# Altium PCB LKS_Motor_0318.PcbDoc (part 1 of 2)
Units mm, origin at the board's own origin, x right, y up, seen from the top; angles counter-clockwise.
Board outline 117 x 10 mm, 2 copper layers (Top Layer, Bottom Layer); 107 components, 71 nets, 323 pads, 186 vias.
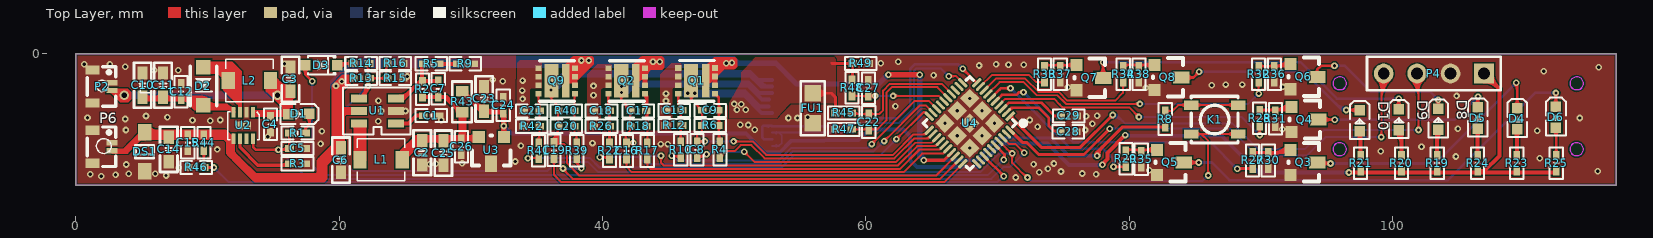
[diagram p0: Top Layer view]
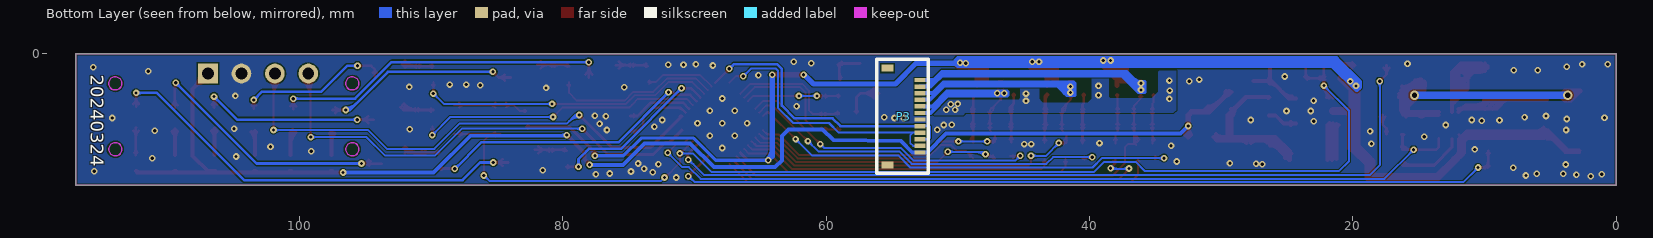
[diagram p1: Bottom Layer view, seen from below]
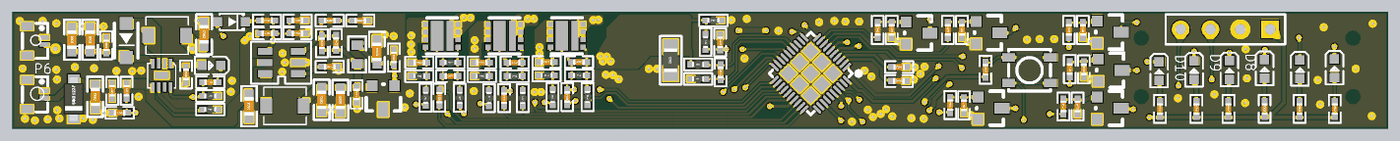
[diagram p3: 3D render of the assembled board from above, using the file's embedded part models]

## Layer stack, top to bottom
Top Solder: solder mask 0.0102, Solder Resist, Dk 3.5
Top Layer: signal copper 0.0356
Dielectric1: core 0.32, FR-4, Dk 4.8
Bottom Layer: signal copper 0.0356
Bottom Solder: solder mask 0.0102, Solder Resist, Dk 3.5

## Board outline
0,-10 0,0 117,0 117,-10

## Design rules (kind name [scope] priority, off if disabled: settings)
Clearance [All] p1: gap=0.1 ignorepadtopadclearanceinfootprint=FALSE except(0: Arc-Hole Track-Hole SMDPad-Hole THPad-Hole Via-Hole Fill-Hole Poly-Hole Region-Hole Text-Hole)
ComponentClearance [All] p1 off: gap=0.254 collisioncheckmode=3 verticalgap=0.254 showdistances=FALSE
FabricationTestpoint [(IsPad And (OnTopLayer Or OnBottomLayer))] p1: side=3 testpointundercomponent=TRUE minsize=1.016 maxsize=2.54 preferedsize=1.524 minholesize=0 maxholesize=1.016 preferedholesize=0.813 testpointgrid=0.025 allowsidetop=TRUE allowsidebottom=TRUE usegrid=TRUE gridtolerance=0
HoleSize [All] p1: absolutevalues=TRUE maxlimit=5.08 minlimit=0.025 maxpercent=80.000 minpercent=20.000
HoleToHoleClearance [All] p1: gap=0.127 allowstackedmicrovias=TRUE
MinimumSolderMaskSliver [All] p1 off: minsoldermaskwidth=0.127
PlaneClearance [All] p1: clearance=0.178
PlaneConnect [All] p1: planeconnectstyle=Direct reliefexpansion=0.508 reliefentries=4 reliefconductorwidth=0.254 reliefairgap=0.254
PolygonConnect [All] p1: connectstyle=Direct reliefconductorwidth=0.254 reliefentries=4 polygonreliefangle="90 Angle" airgapwidth=0.254
RoutingVias [All] p1: holewidth=0.457 width=0.762 viastyle="Through Hole" minholewidth=0.2 minwidth=0.5 maxholewidth=1 maxwidth=2
SilkToSilkClearance [All] p1 off: silktosilkclearance=0
SilkToSolderMaskClearance SilkscreenOverComponentPads [IsPad] p1 off: minsilkscreentomaskgap=0.127 clearancetoexposedcopper=TRUE
SolderMaskExpansion [All] p1: expansion=0.102 istentingtop=FALSE
Width [All] p1: maxlimit=2.54 minlimit=0.127 preferedwidth=0.203
21 further rules are at their usual default settings.

## Components (designator, comment, footprint, x,y, rotation, side; value= is the part's Value field where it differs from the comment)
C1 "1uF/16V" "C 0402_M" 27,-4.699 r180 top
C2 "10uF/16V" "C 0603_M" 26.314,-7.518 r90 top
C3 "22uF/25V" "C 0603_M" 16.307,-1.93 r270 top
C4 "1uF/25V" "C 0402_M" 14.783,-5.359 r270 top
C5 "103" "R 0402_M" 16.84,-7.188 r180 top
C6 "10uF/16V" "C 0603_M" 20.142,-8.077 r90 top
C7 "10pF/16V" "C 0402_M" 27.534,-2.667 r270 top
C8 "4.7uF/25V" "C 0402_M" 47.193,-7.29 r270 top
C9 "1nF" "C 0402_M" 48.187,-4.299 r0 top
C10 "22uF/25V" "C 0603_M" 5.08,-2.388 r270 top
C11 "22uF/25V" "C 0603_M" 6.629,-2.388 r270 top
C12 "4.7uF/25V" "C 0402_M" 8.001,-2.87 r270 top
C13 "1nF" "C 0402_M" 45.441,-4.299 r0 top
C14 "22uF/25V" "C 0603_M" 7.061,-7.264 r90 top
C15 "1uF/25V" "C 0402_M" 8.509,-6.756 r90 top
C16 "4.7uF/25V" "C 0402_M" 41.832,-7.382 r270 top
C17 "1nF" "C 0402_M" 42.721,-4.334 r0 top
C18 "1nF" "C 0402_M" 39.927,-4.334 r0 top
C19 "4.7uF/25V" "C 0402_M" 36.322,-7.341 r270 top
C20 "1nF" "C 0402_M" 37.26,-5.502 r0 top
C21 "1nF" "C 0402_M" 34.619,-4.334 r0 top
C22 "NC" "C 0402_M" 60.223,-5.182 r90 top
C23 "10uF/10V" "C 0603_M" 31.013,-3.429 r270 top
C24 "100nF" "C 0402_M" 32.461,-3.912 r90 top
C25 "10uF/10V" "C 0603_M" 27.915,-7.544 r90 top
C26 "100nF/10V" "C 0402_M" 29.286,-7.061 r270 top
C27 "1nF/50V" "C 0402_M" 60.198,-2.616 r270 top
C28 "100nF/50V" "C 0402_M" 75.387,-5.918 r0 top
C29 "1uF/10V" "C 0402_M" 75.413,-4.724 r180 top
D1 "LED_R" 0603-LED 17.018,-4.648 r180 top
D2 "SS34" SOD123FL 9.703,-2.235 r270 top
D3 "4148" SOD-323 18.644,-0.864 r180 top
D4 "LED_R" 0603-LED 109.55,-4.851 r270 top
D5 "LED_R" 0603-LED 106.553,-4.801 r270 top
D6 "LED_R" 0603-LED 112.497,-4.75 r270 top
D8 "LED_R" 0603-LED 103.556,-4.902 r270 top
D9 "LED_R" 0603-LED 100.559,-4.928 r270 top
D10 "LED_R" 0603-LED 97.587,-5.004 r270 top
DS1 "SMF12CA-MS" SOD-123F 5.232,-7.442 r90 top
FU1 "0.05R" "R 0805_M" 55.982,-4.14 r90 top
K1 "K1" SMD3.3X3.3X2 86.5,-5 r0 top
L1 "6.8uH" "SMD3.5X3 .2- duplicate" 23.19,-8.052 r0 top
L2 "4.7uH" "SMD3.5X3 .2- duplicate" 13.183,-2.032 r0 top
P2 "Header 2" CONN_SMD_2P_0.6 1.88,-2.515 r270 top
P3 "Header 12" SMD-12 52.883,-7.493 r90 bottom
P4 "Header 4" HDR1X4 106.959,-1.499 r180 top
P6 "Header 2" CONN_SMD_2P_0.6 1.88,-7.087 r270 top
Q1 "CJBM3020" DFN-3X3_8 48.543,-3.027 r90 top
Q2 "CJBM3020" DFN-3X3_8 43.229,-3.037 r90 top
Q3 "J3Y" SOT-23 92.253,-7.29 r270 top
Q4 "J3Y" SOT-23 92.329,-4.039 r270 top
Q5 "J3Y" SOT-23 82.118,-7.29 r270 top
Q6 "J3Y" SOT-23 92.253,-0.787 r270 top
Q7 "J3Y" SOT-23 75.997,-0.864 r270 top
Q8 "J3Y" SOT-23 81.94,-0.838 r270 top
Q9 "CJBM3020" DFN-3X3_8 37.921,-3.037 r90 top
R1 "4.7K" "C 0402_M" 16.84,-6.02 r0 top
R2 "2.5M" "C 0402_M" 26.34,-2.692 r90 top
R3 "510" "R 0402_M" 16.84,-8.357 r0 top
R4 "10R" "R 0402_M" 48.919,-7.296 r270 top
R5 "340K" "C 0402_M" 27,-0.762 r0 top
R6 "10K" "R 0402_M" 48.187,-5.442 r180 top
R8 "200K" "C 0402_M" 82.753,-4.953 r270 top
R9 "0" "C 0402_M" 29.591,-0.762 r0 top
R10 "10R" "R 0402_M" 45.949,-7.29 r270 top
R12 "10K" "R 0402_M" 45.441,-5.442 r180 top
R13 "1.5M/NC" "C 0402_M" 21.692,-1.854 r0 top
R14 "1K" "C 0402_M" 21.666,-0.737 r0 top
R15 "100K" "C 0402_M" 24.257,-1.854 r180 top
R16 "100K" "C 0402_M" 24.257,-0.737 r0 top
R17 "10R" "R 0402_M" 43.409,-7.382 r270 top
R18 "10K" "R 0402_M" 42.721,-5.502 r180 top
R19 "1K" "C 0402_M" 103.403,-8.306 r270 top
R20 "1K" "C 0402_M" 100.686,-8.306 r270 top
R21 "1K" "C 0402_M" 97.587,-8.306 r270 top
R22 "10R" "R 0402_M" 40.537,-7.382 r270 top
R23 "1K" "C 0402_M" 109.449,-8.306 r270 top
R24 "1K" "C 0402_M" 106.477,-8.306 r270 top
R25 "1K" "C 0402_M" 112.446,-8.306 r270 top
R26 "10K" "R 0402_M" 39.927,-5.502 r180 top
R27 "10K" "C 0402_M" 89.383,-8.103 r270 top
R28 "10K" "C 0402_M" 89.916,-4.902 r270 top
R29 "10K" "C 0402_M" 79.756,-7.976 r270 top
R30 "100K" "C 0402_M" 90.576,-8.103 r270 top
R31 "100K" "C 0402_M" 91.11,-4.928 r270 top
R32 "10K" "C 0402_M" 89.84,-1.549 r270 top
R33 "10K" "C 0402_M" 73.584,-1.549 r270 top
R34 "10K" "C 0402_M" 79.553,-1.549 r270 top
R35 "100K" "C 0402_M" 80.924,-8.001 r270 top
R36 "100K" "C 0402_M" 91.034,-1.549 r270 top
R37 "100K" "C 0402_M" 74.778,-1.549 r270 top
R38 "100K" "C 0402_M" 80.747,-1.549 r270 top
R39 "10R" "R 0402_M" 38.048,-7.356 r270 top
R40 "10K" "R 0402_M" 37.26,-4.334 r180 top
R41 "10R" "R 0402_M" 35.152,-7.356 r270 top
R42 "10K" "R 0402_M" 34.619,-5.502 r180 top
R43 "0R/NC" 0603 29.337,-3.658 r90 top
R44 "2M" "C 0402_M" 9.728,-6.756 r270 top
R45 "1K1%" "R 0402_M" 58.318,-4.496 r0 top
R46 "470K" "C 0402_M" 9.144,-8.636 r180 top
R47 "1K1%" "R 0402_M" 58.318,-5.74 r0 top
R48 "1K" "R 0402_M" 58.953,-2.591 r270 top
R49 "10R" "R 0402_M" 59.614,-0.737 r0 top
U1 "CS5503R" SOT23-6L 22.962,-4.394 r180 top
U2 "CS5090EL" DFN2X2_8_0.5 12.725,-5.436 r180 top
U3 "CJ6376A33MY" SOT-23 32.512,-6.325 r180 top
U4 "LKS32MC074DOF8Q8" QFN40 67.92,-5.283 r225 top

## Footprints (in the part's own frame and the unit in brackets; to place one, negate y for a bottom-side part, rotate by r counter-clockwise, add the part's x,y. Pads: shape width x height; smd on the part's side, far side on the other; paste and mask are expansions set on the pad)
0603 [mm]
  rect 0.8x0.955 smd: 1(-0.795,0) 2(0.795,0)
  silkscreen extent -1.53,-0.75 1.56,0.75
0603-LED [mm]
  rect 0.8x0.8 smd: 1(0.876,-0.073) 2(-0.723,-0.08)
  silkscreen extent -1.41,-0.82 1.47,0.68
"C 0402_M" [mil] "无极性贴片电容"
  rect 26x20 smd: 1(-24,0) 2(24,0)
  silkscreen extent -47,-20 47,20, body extent -20,-10 20,10, height 21
"C 0603_M" [mil] "无极性贴片电容"
  rect 40x30 smd: 1(-36.5,0) 2(36.5,0)
  silkscreen extent -68,-26 68,26, body extent -31,-16 31,16, height 32
CONN_SMD_2P_0.6 [mm]
  rect 0.4x0.8 smd: 1(-0.324,0.871) 2(0.276,0.871)
  rect 0.7x1.05 smd: 3(1.226,-0.604) 4(-1.274,-0.604)
  silkscreen extent -1.52,-1.01 1.48,1.15
DFN2X2_8_0.5 [mm]
  rect 0.3x0.8 smd: 1(-0.75,-1) 2(-0.25,-1) 3(0.25,-1) 4(0.75,-1) 5(0.75,1) 6(0.25,1) 7(-0.25,1) 8(-0.75,1)
  rect 1.2x0.6 smd: 9(0,0)
  silkscreen extent -1.19,-1.02 1.2,1.08
DFN-3X3_8 [mil]
  rect 17x18 smd: 1(0,0) 2(25.59,0) 3(51.18,0) 4(76.77,0) 5(76.77,109.58) 6(51.18,109.58) 7(25.59,109.58) 8(0,109.58)
  rect 100x23 smd: 9(38.33,27.5)
  rect 100x42 smd: 10(38.33,70.83)
  silkscreen extent -23,2 99,106
HDR1X4 [mm] "Connector; Header; 4 Position"
  rect 1.5x1.5 hole 0.9: 1(0,0)
  round 1.5 hole 0.9: 2(2.54,0) 3(5.08,0) 4(7.62,0)
  silkscreen extent -1.27,-1.27 8.89,1.27
QFN40 [mm]
  rect 1.05x1.05 smd: 0(-1.32,-1.352) 0(-1.32,1.308) 0(-1.32,-0.022) 0(0.01,-0.022) 0(0.01,-1.352) 0(0.01,1.308) 0(1.34,-1.352) 0(1.34,-0.022) 0(1.34,1.308)
  rect 0.9x0.24 smd: 1(-2.54,1.778)
  oval 0.9x0.24 smd: 2(-2.54,1.378) 3(-2.54,0.978) 4(-2.54,0.578) 5(-2.54,0.178) 6(-2.54,-0.222) 7(-2.54,-0.622) 8(-2.54,-1.022) 9(-2.54,-1.422) 10(-2.54,-1.822) 21(2.56,-1.822) 22(2.56,-1.422) 23(2.56,-1.022) 24(2.56,-0.622) 25(2.56,-0.222) 26(2.56,0.178) 27(2.56,0.578) 28(2.56,0.978) 29(2.56,1.378) 30(2.56,1.778)
  oval 0.24x0.9 smd: 11(-1.79,-2.572) 12(-1.39,-2.572) 13(-0.99,-2.572) 14(-0.59,-2.572) 15(-0.19,-2.572) 16(0.21,-2.572) 17(0.61,-2.572) 18(1.01,-2.572) 19(1.41,-2.572) 20(1.81,-2.572) 31(1.81,2.528) 32(1.41,2.528) 33(1.01,2.528) 34(0.61,2.528) 35(0.21,2.528) 36(-0.19,2.528) 37(-0.59,2.528) 38(-0.99,2.528) 39(-1.39,2.528) 40(-1.79,2.528)
  silkscreen extent -2.98,-2.52 2.51,2.97
"R 0402_M" [mil] "1/16W贴片电阻"
  rect 26x20 smd: 1(-24,0) 2(24,0)
  silkscreen extent -47,-20 47,20, body extent -20,-10 20,10, height 12
"R 0805_M" [mil] "1/8W贴片电阻"
  rect 50x50 smd: 1(-45,0) 2(45,0)
  silkscreen extent -81,-36 81,36, body extent -39,-25 39,25, height 20
SMD3.3X3.3X2 [mm]
  rect 1.1x0.7 smd: 1(-1.775,1.1) 1(1.775,1.1) 2(-1.775,-1.1) 2(1.775,-1.1)
  silkscreen extent -1.78,-1.78 1.78,1.78
"SMD3.5X3 .2- duplicate" [mm]
  rect 1x1.3 smd: 1(-1.6,0) 2(1.6,0)
  silkscreen extent -1.8,-1.6 1.8,1.6
SMD-12 [mil]
  rect 22x36 smd: 0(252.38,97.5) 0/2(-37.62,97.5)
  rect 13x32 smd: 1(216.53,0) 2(196.85,0) 3(177.17,0) 4(157.48,0) 5(137.79,0) 6(118.11,0) 7(98.42,0) 8(78.74,0) 9(59.05,0) 10(39.37,0) 11(19.69,0) 12(0,0)
  silkscreen extent -62,-25 279,130
SOD123FL [mm]
  rect 1.1x1.1 smd: 1(-1.228,-0.006) 2(1.673,-0.006)
  silkscreen extent -1.28,-1.01 1.72,0.99
SOD-123F [mm]
  rect 1.25x1 smd: 1(1.475,0) 2(-1.475,0)
  silkscreen extent -0.5,-0.7 0.5,0.7, body extent -1.9,-0.85 1.85,0.85, height 1.2
SOD-323 [mm]
  rect 0.8x0.8 smd: 1(1.2,0) 2(-1.2,0)
  silkscreen extent -1.1,-0.7 1,0.7
SOT23-6L [mm]
  rect 1.2x0.6 smd: 1(-1.349,0.899) 2(-1.349,-0.051) 3(-1.349,-1.001) 4(1.451,-1.001) 5(1.451,-0.051) 6(1.451,0.899)
  silkscreen extent -2.45,-1.85 2.65,1.75
SOT-23 [mil]
  rect 36x36 smd: 1(0,0) 2(75,0)
  rect 36x50 smd: 3(38,80)
  silkscreen extent -20,-5 95,85

## Part data
C1 C4 C24: library part CAP
C2 C3 C5 C6 C7 C8 C9 C10 C11 C12 C13 C14 C15 C16 C17 C18 C19 C20 C21 C22 C23 C25 C26: library part CAP, "Capacitor"
C27 C28 C29: library part C, "Capacitor"
D1 D4 D5 D6 D8 D9 D10: library part LED
D2 D3: library part Diode, "Default Diode"
DS1: library part DIODE-3, "12V/19.9V"
FU1 R4 R6 R10 R12 R17 R18 R22 R26 R39 R40 R41 R42 R45 R47 R48 R49: library part RAS
L1 L2: library part Inductor, "Inductor"
P2 P6: "Header, 2-Pin"
P3: "Header, 12-Pin"
P4: "Header, 4-Pin"
Q3 Q4 Q5 Q6 Q7 Q8: library part NPN, "NPN Transistor"
R1 R2 R3 R5 R8 R9 R13 R14 R15 R16 R19 R20 R21 R23 R24 R25 R27 R28 R29 R30 R31 R32 R33 R34 R35 R36 R37 R38 R43 R44 R46: library part RES2_S
U3: library part 78L15
U4: library part LKS32MC074DF8Q8, "芯片"

## Via types
v1: diameter 0.5, hole 0.25, Top Layer to Bottom Layer, 184 vias
v2: diameter 0.7, hole 0.4, Top Layer to Bottom Layer, 2 vias

## Nets (pads, with @x,y where several pads share a name; then routed paths per layer and width w, separated by ;. In a path a pad name is that pad's centre, name@x,y a point inside that pad or via, vN(x,y) a via of type N, cw(c..) or ccw(c..) an arc to the next point about the centre after c; other vN are vias at no path point)
1ST: R29.2 U4.6 | length 17.4
  Top Layer w0.2: U4.6@69.559,-3.33 70.273,-2.616 ; 70.163,-2.726 70.273,-2.616 ; v1@70.887,-2.722 ccw(c70.631,-2.978) 70.631,-2.616 ccw(c70.631,-2.254) v1@70.887,-2.51 ; v1(70.993,-2.616) 70.273,-2.616 ; v1(78.816,-8.585) R29.2@79.731,-8.585 ; v1@78.922,-8.691 cw(c79.178,-8.947) 79.178,-8.585 cw(c79.178,-8.223) v1@78.922,-8.479 ; R29.2@79.647,-8.694 ccw(c79.384,-8.957) 79.384,-8.585 ccw(c79.384,-8.213) R29.2@79.647,-8.476
  Bottom Layer w0.2: v1@70.993,-2.766 cw(c70.993,-3.128) 71.249,-2.872 cw(c71.505,-2.616) v1@71.143,-2.616 ; v1(70.993,-2.616) 75.59,-7.214 75.819,-7.214 ; 76.632,-7.214 75.819,-7.214 ; 78.215,-7.399 78.029,-7.214 ; v1@78.71,-8.479 ccw(c78.454,-8.223) 78.816,-8.223 ccw(c79.178,-8.223) v1@78.922,-8.479 ; v1(78.816,-8.585) 78.816,-8.001 78.029,-7.214 ; 75.819,-7.214 76.251,-7.214 78.029,-7.214
2ND: R27.2 U4.5 | length 25.8
  Top Layer w0.2: U4.5@69.842,-3.613 70.33,-3.124 71.45,-3.124 71.653,-2.921 v1(71.984,-2.921) ; 71.563,-3.011 cw(c71.915,-3.362) v1@71.991,-2.872 ; v1(88.214,-8.738) 88.24,-8.712 R27.2@89.383,-8.712 ; v1@88.32,-8.844 cw(c88.638,-9.161) 88.638,-8.712 ; v1@88.32,-8.632 ccw(c88.515,-8.437) 88.515,-8.712 ; R27.2@89.274,-8.821 ccw(c89.011,-9.084) 89.011,-8.712 ccw(c89.011,-8.34) R27.2@89.274,-8.603
  Bottom Layer w0.2: v1@71.984,-3.071 cw(c71.984,-3.433) 72.24,-3.177 cw(c72.496,-2.921) v1@72.134,-2.921 ; v1(71.984,-2.921) 75.794,-6.731 ; 76.581,-6.731 75.794,-6.731 ; v1@88.064,-8.738 ccw(c87.702,-8.738) 87.958,-8.482 ccw(c88.214,-8.225) v1@88.214,-8.588 ; v1(88.214,-8.738) 86.208,-6.731 75.794,-6.731
3RD: R28.2 U4.4 | length 25.8
  Top Layer w0.15: U4.4@70.124,-3.896 70.591,-3.429 72.136,-3.429 ; 72.39,-3.429 72.136,-3.429 ; v1@80.572,-4.801 ccw(c80.149,-4.801) 80.448,-4.502 ccw(c80.747,-4.203) v1@80.747,-4.626 ; v1(80.747,-4.801) 80.035,-4.089 74.981,-4.089 74.752,-3.861 74.32,-3.429 72.136,-3.429 ; R28.2@89.789,-5.715 cw(c89.484,-6.02) 89.916,-6.02 cw(c90.348,-6.02) R28.2@90.043,-5.715 ; v1@89.792,-6.048 ccw(c89.494,-5.75) 89.916,-5.75 ccw(c90.338,-5.75) v1@90.04,-6.048 ; v1(89.916,-6.172) R28.2@89.916,-5.512
  Bottom Layer w0.15: v1(80.747,-4.801) 84.963,-4.801 ; v1@80.87,-4.924 cw(c81.169,-5.223) 81.169,-4.801 cw(c81.169,-4.378) v1@80.87,-4.677 ; 85.42,-4.801 84.963,-4.801 ; v1@89.741,-6.172 ccw(c89.319,-6.172) 89.617,-5.873 ccw(c89.916,-5.575) v1@89.916,-5.997 ; v1(89.916,-6.172) 88.544,-4.801 84.963,-4.801
+3.3V: C23.2 C24.1 P3.12 P4.1 R19.2 R20.2 R21.2 R23.2 R24.2 R25.2 R43.2 U3.1 | length 111.5
  Top Layer w0.3: R43.2@29.235,-2.888 R43.2@29.393,-2.888 ; C24.1@32.385,-4.521 32.271,-4.407 C24.1@32.512,-4.648 ; v1(77.978,-8.433) 77.978,-8.382 78.359,-8.001 78.359,-7.518 v1(79.705,-6.172) ; v1@78.078,-8.433 cw(c78.442,-8.433) 78.185,-8.175 ; v1(96.698,-9.017) 100.686,-9.017 106.477,-9.017 112.344,-9.017 R25.2@112.446,-8.915 ; 97.274,-9.017 ccw(c97.274,-8.679) R21.2@97.513,-8.918 ; R21.2@97.66,-8.918 ccw(c97.899,-8.679) 97.899,-9.017 ; 100.373,-9.017 ccw(c100.373,-8.679) R20.2@100.612,-8.918 ; R20.2@100.759,-8.918 ccw(c100.998,-8.679) 100.998,-9.017 ; 103.091,-9.017 ccw(c103.091,-8.679) R19.2@103.33,-8.918 ; R19.2@103.477,-8.918 ccw(c103.716,-8.679) 103.716,-9.017 ; 106.164,-9.017 ccw(c106.164,-8.679) R24.2@106.403,-8.918 ; R24.2@106.477,-8.915 106.959,-8.915 108.128,-7.747 108.128,-2.667 P4.1@106.959,-1.499 ; R24.2@106.55,-8.918 ccw(c106.789,-8.679) 106.789,-9.017 ; P4.1@106.959,-2.099 cw(c106.959,-3.547) 107.984,-2.523 cw(c109.008,-1.499) P4.1@107.559,-1.499 ; 109.136,-9.017 ccw(c109.136,-8.679) R23.2@109.375,-8.918 ; R23.2@109.522,-8.918 ccw(c109.761,-8.679) 109.761,-9.017 ; 112.133,-9.017 ccw(c112.133,-8.679) R25.2@112.372,-8.918
  Top Layer w0.4: R43.2@29.393,-2.888 30.912,-4.407 C24.1@32.271,-4.407 ; R43.2@29.414,-3.063 cw(c29.414,-3.432) R43.2@29.676,-3.171 ; R43.2@29.614,-2.863 ccw(c30.211,-2.863) 29.789,-3.284 ; 30.227,-3.723 ccw(c31.013,-2.937) C23.2@31.013,-4.048 ; C23.2@31.141,-4.228 ccw(c31.573,-3.796) 31.573,-4.407 ; U3.1@32.33,-6.143 ccw(c31.891,-5.704) 32.512,-5.704 ccw(c33.133,-5.704) U3.1@32.694,-6.143 ; C24.1@32.423,-4.636 cw(c32.208,-4.85) C24.1@32.512,-4.85 ; U3.1@32.512,-6.325 v1(32.512,-5.486) C24.1@32.512,-4.648
  Bottom Layer w0.3: v1(32.512,-5.486) 33.096,-6.071 50.902,-6.071 52.324,-7.493 P3.12@52.883,-7.493 53.467,-7.493 54.331,-6.629 59.461,-6.553 60.274,-5.74 62.865,-5.74 63.373,-6.248 63.373,-8.103 63.881,-8.611 68.529,-8.611 70.333,-6.807 73.812,-6.807 75.438,-8.433 v1(77.978,-8.433) ; v1(79.705,-6.172) 79.756,-6.223 87.02,-6.223 89.814,-9.017 v1(96.698,-9.017) ; v1@79.776,-6.101 ccw(c80.069,-5.808) 80.069,-6.223
BAT_ADC: R44.2 R46.1 U4.33 | length 69.3
  Top Layer w0.15: R46.1@9.754,-8.636 v1(10.49,-8.636) ; R46.1@9.956,-8.763 cw(c10.262,-9.068) 10.262,-8.636 cw(c10.262,-8.204) R46.1@9.956,-8.509 ; v1@10.366,-8.76 ccw(c10.068,-9.058) 10.068,-8.636 ccw(c10.068,-8.214) v1@10.366,-8.512
  Top Layer w0.2: R44.2@9.619,-7.551 cw(c9.356,-7.814) 9.728,-7.814 cw(c10.1,-7.814) R44.2@9.837,-7.551 ; R46.1@9.645,-8.527 ccw(c9.443,-8.326) 9.728,-8.326 ; 9.728,-8.203 ccw(c10.187,-8.203) R46.1@9.862,-8.527 ; R44.2@9.728,-7.366 9.728,-8.611 R46.1@9.754,-8.636 ; U4.33@68.993,-7.785 70.485,-9.277 v1(70.485,-9.302) ; 70.211,-9.003 cw(c69.912,-9.302) v1@70.335,-9.302 ; 70.272,-9.064 ccw(c70.485,-8.852) v1@70.485,-9.152
  Bottom Layer w0.15: v1@10.49,-8.811 cw(c10.49,-9.233) 10.789,-8.935 cw(c11.088,-8.636) v1@10.665,-8.636 ; v1@10.49,-8.712 v1(10.49,-8.636) 11.608,-9.754 37.135,-9.754 69.983,-9.754 70.434,-9.302 v1(70.485,-9.302) ; 70.1,-9.637 cw(c70.485,-10.022) v1@70.485,-9.477 ; 70.222,-9.514 ccw(c70.01,-9.302) v1@70.31,-9.302
BLUE: R32.2 U4.7 | length 29.7
  Top Layer w0.15: U4.7@69.276,-3.047 70.164,-2.159 71.984,-2.159 72.974,-3.15 74.549,-3.15 75.209,-3.81 ; 75.463,-3.81 75.209,-3.81 ; R32.2@89.713,-2.362 cw(c89.408,-2.667) 89.84,-2.667 cw(c90.272,-2.667) R32.2@89.966,-2.362 ; v1@89.716,-2.899 ccw(c89.417,-2.6) 89.84,-2.6 ccw(c90.262,-2.6) v1@89.964,-2.899 ; v1(89.84,-3.023) R32.2@89.84,-2.159 ; 75.209,-3.81 79.756,-3.81 ; 79.756,-3.81 v1(80.823,-3.81) 79.756,-3.81 ; 80.4,-3.81 cw(c80.4,-4.232) 80.699,-3.934 ccw(c80.4,-4.232) 80.4,-3.81 ; 80.4,-3.81 ccw(c80.4,-3.388) 80.699,-3.686 cw(c80.4,-3.388) 80.4,-3.81
  Bottom Layer w0.15: v1(80.823,-3.81) 89.052,-3.81 89.205,-3.658 ; v1@80.947,-3.934 cw(c81.245,-4.232) 81.245,-3.81 cw(c81.245,-3.388) v1@80.947,-3.686 ; 89.205,-3.658 v1(89.84,-3.023) 89.205,-3.658 ; 89.541,-3.321 cw(c89.84,-3.62) 89.84,-3.198 ccw(c89.84,-3.62) 89.541,-3.321 ; 89.541,-3.321 ccw(c89.242,-3.023) 89.665,-3.023 cw(c89.242,-3.023) 89.541,-3.321
BUTTON: K1.2 R13.2 R14.2 R15.2 R16.1 U1.4 U4.37 | length 102.4
  Top Layer w0.15: U4.37@70.124,-6.654 71.04,-7.569 v1(71.12,-7.569) ; 70.685,-7.214 ccw(c71.12,-6.779) v1@71.12,-7.394 ; 70.878,-7.407 cw(c70.716,-7.569) v1@70.945,-7.569 ; v1@70.996,-7.693 cw(c70.698,-7.992) 71.12,-7.992 cw(c71.542,-7.992) v1@71.244,-7.693 ; v1@71.12,-7.649 71.12,-8.28 v1@72.238,-9.398 ; 71.903,-9.063 ccw(c72.288,-8.678) v1@72.288,-9.223 ; 72.026,-9.186 cw(c71.814,-9.398) v1@72.113,-9.398 ; K1.2@84.725,-6.1 85.5,-6.1 ; K1.2@85.139,-6.273 cw(c85.5,-6.564) 85.5,-6.1 ; K1.2@85.139,-5.927 ccw(c85.5,-5.636) 85.5,-6.1 ; v1@85.881,-9.122 ccw(c85.582,-8.823) 86.004,-8.823 ccw(c86.427,-8.823) v1@86.128,-9.122 ; v1(86.004,-9.246) 86.004,-6.604 85.5,-6.1 ; K1.2@87.88,-6.294 ccw(c87.411,-6.764) 87.411,-6.1 ccw(c87.411,-5.436) K1.2@87.88,-5.905 ; K1.2@88.275,-6.1 85.5,-6.1
  Top Layer w0.2: U1.4@21.511,-3.393 22.2,-2.705 ; U1.4@21.737,-3.167 ccw(c20.983,-2.413) v1@22.05,-2.413 ; U1.4@21.811,-3.393 cw(c22.269,-3.297) 21.938,-2.966 ; U1.4@22.007,-3.352 cw(c22.702,-3.207) 22.2,-2.705 ; 22.079,-2.825 ccw(c21.666,-2.413) v1@22.25,-2.413 ; R14.2@22.091,-0.845 cw(c21.828,-1.108) 22.2,-1.108 cw(c22.571,-1.108) R14.2@22.308,-0.845 ; v1@22.094,-2.307 ccw(c21.837,-2.051) 22.2,-2.051 ccw(c22.562,-2.051) v1@22.306,-2.307 ; R13.2@22.116,-1.963 cw(c21.915,-2.165) v1@22.2,-2.165 ; R13.2@22.116,-1.745 ccw(c21.915,-1.544) 22.2,-1.544 ; v1@22.2,-2.287 cw(c22.658,-2.287) R13.2@22.334,-1.963 ; 22.2,-1.421 ccw(c22.658,-1.421) R13.2@22.334,-1.745 ; R14.2@22.2,-0.737 R13.2@22.2,-1.854 ; R13.2@22.486,-1.963 cw(c22.749,-2.226) 22.749,-1.854 cw(c22.749,-1.482) R13.2@22.486,-1.745 ; R15.2@23.462,-1.963 ccw(c23.199,-2.226) 23.199,-1.854 ccw(c23.199,-1.482) 23.462,-1.745 ccw(c23.199,-1.482) 23.571,-1.482 ccw(c23.943,-1.482) R15.2@23.68,-1.745 ; R16.1@23.462,-0.845 cw(c23.199,-1.108) 23.571,-1.108 cw(c23.943,-1.108) R16.1@23.68,-0.845 ; R16.1@23.571,-0.737 23.571,-1.854 R13.2@22.2,-1.854 ; 22.2,-2.705 R13.2@22.2,-1.854
  Bottom Layer w0.15: v1@22.025,-2.413 cw(c21.602,-2.413) 21.901,-2.712 cw(c22.2,-3.01) v1@22.2,-2.588 ; v1(22.2,-2.413) 20.295,-4.318 20.295,-8.153 21.057,-8.915 35.789,-8.915 36.5,-8.204 38.887,-8.204 39.649,-8.966 68.732,-8.966 70.129,-7.569 v1(71.12,-7.569) ; v1@70.996,-7.693 ccw(c70.698,-7.992) 70.698,-7.569 ccw(c70.698,-7.147) v1@70.996,-7.445 ; v1(72.288,-9.398) 72.568,-9.677 85.547,-9.677 v1@85.992,-9.233 ; 85.662,-9.562 cw(c86.004,-9.904) v1@86.004,-9.421 ; 85.724,-9.501 ccw(c85.468,-9.246) v1@85.829,-9.246
CH_STAT: C5.2 R1.1 U2.8 U4.38 | length 70
  Top Layer w0.15: U4.38@70.407,-6.371 70.906,-6.869 71.385,-6.869 v1(72.034,-7.518) ; v1@71.859,-7.518 ccw(c71.437,-7.518) 71.736,-7.22 ccw(c72.034,-6.921) v1@72.034,-7.343
  Top Layer w0.2: U2.8@13.475,-6.436 13.475,-7.075 13.691,-7.29 v1(15.392,-7.29) 16.231,-7.29 R1.1@16.231,-6.121 ; v1@15.286,-7.396 ccw(c15.03,-7.652) 15.03,-7.29 ccw(c15.03,-6.928) v1@15.286,-7.184 ; v1@15.498,-7.396 cw(c15.755,-7.652) 15.755,-7.29 cw(c15.755,-6.928) v1@15.498,-7.184 ; v1@15.537,-7.29 ccw(c15.537,-6.571) C5.2@16.046,-7.079 ; C5.2@16.122,-7.079 ccw(c15.859,-6.816) 16.231,-6.816 ccw(c16.602,-6.816) C5.2@16.339,-7.079 ; R1.1@16.122,-6.129 cw(c15.859,-6.392) 16.231,-6.392 cw(c16.602,-6.392) R1.1@16.339,-6.129
  Bottom Layer w0.15: v1@15.392,-7.465 cw(c15.392,-7.887) 15.691,-7.589 cw(c15.99,-7.29) v1@15.567,-7.29 ; v1(15.392,-7.29) 17.602,-9.5 69.545,-9.5 70.434,-8.611 70.942,-8.611 v1(72.034,-7.518) ; v1@71.859,-7.518 cw(c71.437,-7.518) 71.736,-7.817 cw(c72.034,-8.116) v1@72.034,-7.693
DCDC_5V: C2.2 C7.2 C25.2 C26.1 L1.2 R2.1 R43.1 U3.2 | length 70.3
  Top Layer w0.3: L1.2@24.664,-7.575 ccw(c24.593,-7.392) 24.79,-7.392 ; L1.2@24.79,-7.852 ccw(c24.79,-7.215) L1.2@25.24,-7.665 ; L1.2@24.84,-7.902 cw(c26.193,-7.902) 25.236,-6.945 ; L1.2@24.916,-7.575 cw(c24.987,-7.392) 24.79,-7.392 ; 24.98,-7.202 cw(c26.314,-8.537) 26.314,-6.649 ccw(c26.314,-7.74) 25.543,-6.969 ; L1.2@25.031,-7.481 cw(c26.314,-8.764) 26.314,-6.949 ccw(c26.314,-7.814) 25.703,-7.202 ; L1.2@25.08,-7.432 cw(c24.79,-7.141) 24.79,-7.552 ccw(c24.79,-6.191) 25.752,-7.153 ; L1.2@25.237,-7.669 ccw(c25.469,-7.902) L1.2@25.14,-7.902 ; 25.492,-6.69 cw(c26.314,-7.513) C2.2@26.314,-6.349 ; 25.515,-6.997 ccw(c26.42,-7.902) L1.2@25.14,-7.902 ; 25.724,-6.788 cw(c25.956,-7.02) C2.2@26.166,-6.768 ; 25.748,-6.433 ccw(c27.217,-7.902) L1.2@25.14,-7.902 ; C2.2@26.088,-6.512 ccw(c25.857,-6.561) 25.857,-6.325 ; C2.2@26.113,-6.704 ccw(c25.921,-6.811) 25.921,-6.591 ; C2.2@26.113,-6.479 cw(c25.921,-6.371) 25.921,-6.591 ; R2.1@26.34,-3.302 26.365,-3.277 C7.2@27.534,-3.277 ; R2.1@26.413,-3.376 cw(c26.652,-3.614) 26.652,-3.277 ; C2.2@26.478,-6.755 cw(c26.872,-7.149) 26.872,-6.591 cw(c26.872,-6.034) C2.2@26.478,-6.428 ; 27.296,-6.591 cw(c27.296,-7.236) C25.2@27.751,-6.78 ; 27.418,-6.591 ccw(c27.418,-6.12) C25.2@27.751,-6.453 ; C25.2@28.078,-6.78 cw(c28.534,-7.236) 28.534,-6.591 ; C25.2@28.078,-6.453 ccw(c28.411,-6.12) 28.411,-6.591 ; 28.748,-3.991 ccw(c29.26,-3.48) 29.26,-4.203 cw(c29.26,-3.786) R43.1@28.965,-4.081 ; 28.778,-3.894 cw(c28.219,-4.453) 29.01,-4.453 ccw(c28.525,-4.453) R43.1@28.868,-4.11 ; 28.882,-6.591 ccw(c28.882,-6.123) C26.1@29.213,-6.454 ; C26.1@29.213,-6.302 ccw(c28.422,-5.511) 29.54,-5.511 ; C26.1@29.221,-6.591 ccw(c29.221,-4.939) U3.2@30.39,-6.107 ; 29.235,-6.002 ccw(c29.66,-6.002) C26.1@29.36,-6.302 ; 29.235,-5.114 cw(c29.921,-5.114) 29.436,-4.629 ccw(c29.799,-4.992) 29.286,-4.992 ; 29.235,-4.998 ccw(c28.714,-4.998) 29.083,-4.629 cw(c28.592,-5.121) 29.286,-5.121 ; R43.1@29.238,-4.629 cw(c28.507,-5.36) 29.54,-5.36 ; R43.1@29.286,-4.503 C26.1@29.286,-6.452 ; C26.1@29.36,-6.454 ccw(c29.691,-6.123) 29.691,-6.591 ; C26.1@29.425,-6.514 ccw(c29.146,-6.235) 29.54,-6.235 ; 29.946,-6.591 ccw(c29.946,-5.663) U3.2@30.602,-6.32 ; L1.2@24.79,-8.052 24.79,-7.392 ; L1.2@24.79,-8.052 24.79,-7.722 25.921,-6.591 ; L1.2@24.79,-8.052 24.854,-8.052 C2.2@26.314,-6.591 ; 24.79,-7.392 25.857,-6.325 ; 25.857,-6.325 30.099,-6.325 ; 25.921,-6.591 C2.2@26.314,-6.591 ; C2.2@26.314,-6.591 30.34,-6.591 U3.2@30.607,-6.325 30.099,-6.325 ; C2.2@26.314,-6.591 C2.2@26.581,-6.325 ; C2.2@26.478,-6.628 cw(c27.209,-7.359) 27.209,-6.325 ; C2.2@26.478,-6.628 cw(c27.209,-7.359) 27.209,-6.325 ; C2.2@26.478,-6.628 cw(c27.209,-7.359) 27.209,-6.325 ; C2.2@26.581,-6.325 27.483,-6.325 ; C2.2@26.581,-6.325 27.483,-6.325 ; 26.958,-6.325 cw(c26.958,-7.446) C25.2@27.751,-6.653 ; 26.958,-6.325 cw(c26.958,-7.446) C25.2@27.751,-6.653 ; 26.958,-6.325 cw(c26.958,-7.446) C25.2@27.751,-6.653 ; 27.483,-6.325 cw(c27.483,-6.527) C25.2@27.684,-6.51 ; 27.483,-6.325 cw(c27.483,-6.527) C25.2@27.684,-6.51 ; 27.483,-6.325 cw(c27.483,-6.527) C25.2@27.684,-6.51 ; 27.483,-6.325 30.099,-6.325 ; C7.2@27.534,-3.277 28.161,-3.277 R43.1@29.337,-4.453 29.54,-4.656 29.54,-6.198 C26.1@29.286,-6.452 ; C7.2@27.534,-3.277 28.034,-3.277 29.235,-4.478 29.235,-6.401 C26.1@29.286,-6.452 ; 29.865,-6.325 cw(c29.865,-7.066) 30.39,-6.542 ccw(c29.865,-7.066) 29.865,-6.325 ; 29.865,-6.325 ccw(c29.865,-5.583) U3.2@30.39,-6.107 ; 29.865,-6.325 ccw(c29.865,-5.583) U3.2@30.39,-6.107 ; 30.099,-6.325 cw(c30.099,-6.591) U3.2@30.335,-6.467 ; 30.099,-6.325 ccw(c30.099,-6.058) U3.2@30.335,-6.182 ; 30.099,-6.325 cw(c30.099,-6.591) U3.2@30.335,-6.467 ; 30.099,-6.325 ccw(c30.099,-6.058) U3.2@30.335,-6.182 ; 30.099,-6.325 cw(c30.099,-6.591) U3.2@30.335,-6.467 ; 30.099,-6.325 ccw(c30.099,-6.058) U3.2@30.335,-6.182 ; C25.2@28.078,-6.653 cw(c28.871,-7.446) 28.871,-6.325 ccw(c28.871,-7.446) C25.2@28.078,-6.653 ; 28.912,-6.325 cw(c28.912,-6.749) 29.213,-6.449 ccw(c28.912,-6.749) 28.912,-6.325 ; C26.1@29.36,-6.449 cw(c29.66,-6.749) 29.66,-6.325 ccw(c29.66,-6.749) C26.1@29.36,-6.449
DCDC_EN: D3.1 U4.36 | length 66.2
  Top Layer w0.2: D3.1@17.236,-1.08 cw(c16.765,-1.569) 17.444,-1.569 ; D3.1@17.444,-0.864 17.444,-1.569 ; D3.1@17.652,-1.08 ccw(c18.122,-1.569) 17.444,-1.569 ; U4.36@69.842,-6.936 70.536,-7.631 ; v1@70.391,-7.935 ccw(c70.144,-7.631) 70.536,-7.631 ; v1(70.485,-8.052) 70.536,-8.001 70.536,-7.631 ; 17.444,-1.569 17.615,-1.74 ; 17.615,-1.74 v1(17.958,-2.083) 17.615,-1.74
  Bottom Layer w0.15: v1@17.834,-2.207 cw(c17.535,-2.505) 17.958,-2.505 cw(c18.38,-2.505) v1@18.082,-2.207 ; v1(17.958,-2.083) 17.958,-8.458 18.72,-9.22 36.246,-9.22 ; 36.627,-9.22 36.246,-9.22 ; 70.1,-8.386 cw(c70.485,-8.772) v1@70.485,-8.227 ; 70.222,-8.264 ccw(c70.01,-8.052) v1@70.31,-8.052 ; v1(70.485,-8.052) 70.434,-8.052 69.266,-9.22 36.246,-9.22
GND: C1.1 C2.1 C3.1 C4.2 C5.1 C6.1 C10.1 C11.1 C12.1 C14.1 C15.1 C23.1 C24.2 C25.1 C26.2 C27.1 C28.2 C29.1 DS1.2 FU1.1 P2.1 P2.3 P2.4 P3.7 P4.2 P6.1 P6.3 P6.4 Q3.2 Q4.2 Q5.2 Q6.2 Q7.2 Q8.2 R3.2 R9.2 R15.1 R16.2 R30.2 R31.2 R35.2 R36.2 R37.2 R38.2 R46.2 R47.1 R49.2 U1.2 U2.2 U2.9 U3.3 U4.0
  other v1: 71.399,-9.398 1.93,-9.296 6.858,-9.246 3.023,-9.195 1.092,-9.144 77.495,-9.144 4.013,-9.119 6.045,-9.119 76.454,-9.093 73.177,-8.992 74.828,-8.941 115.595,-8.915 81.534,-8.839 73.838,-8.738 7.823,-8.661 3.835,-8.407 26.873,-8.382 72.746,-8.382 27.356,-8.357 74.295,-8.331 29.337,-8.306 33.376,-8.179 111.201,-7.925 104.826,-7.798 99.111,-7.391 10.744,-7.264 67.897,-7.156 102.21,-7.061 33.807,-6.985 44.425,-6.858 44.958,-6.858 18.593,-6.833 39.243,-6.782 14.58,-6.299 66.957,-6.215 68.837,-6.215 18.694,-5.893 110.998,-5.842 3.81,-5.791 76.657,-5.791 51.562,-5.766 91.643,-5.74 104.978,-5.69 73.05,-5.537 12.954,-5.41 51.079,-5.41 50.47,-5.385 77.216,-5.309 66.016,-5.275 67.897,-5.275 69.778,-5.275 22.962,-5.131 10.211,-5.08 8.865,-5.055 10.973,-5.029 27.762,-5.029 72.466,-5.029 3.759,-4.953 54.127,-4.877 54.813,-4.877 114.224,-4.877 0.889,-4.851 6.96,-4.826 55.601,-4.826 76.733,-4.75 5.334,-4.724 77.572,-4.699 23.19,-4.343 25.044,-4.343 66.957,-4.334 68.837,-4.334 62.255,-3.988 22.987,-3.556 67.897,-3.394 104.877,-3.2 81.28,-2.591 75.336,-2.54 91.669,-2.515 86.284,-2.388 87.351,-2.337 88.595,-2.337 32.436,-2.083 31.674,-1.956 25.171,-1.727 65.151,-1.626 111.506,-1.321 5.969,-1.245 7.772,-1.245 115.672,-1.016 3.759,-0.991 68.605,-0.889 70.841,-0.838 72.009,-0.838 0.651,-0.79 2.591,-0.787 69.901,-0.787 15.85,-0.762 61.138,-0.711 62.459,-0.61
GREEN: R34.2 U4.8 | length 13.3
  Top Layer w0.15: U4.8@68.993,-2.764 69.878,-1.88 72.111,-1.88 73.127,-2.896 74.651,-2.896 75.311,-3.556 78.943,-3.556 79.527,-2.972 R34.2@79.527,-2.159 ; R34.2@79.426,-2.362 cw(c79.182,-2.606) 79.527,-2.606 ; 79.527,-2.729 cw(c80.046,-2.729) R34.2@79.679,-2.362
HO1: R39.2 U4.29 | length 37.5
  Top Layer w0.15: v1@37.008,-8.887 cw(c37.008,-9.187) 37.22,-8.975 ; v1(37.008,-8.712) 37.033,-8.712 37.109,-8.788 37.109,-8.865 37.744,-9.5 65.652,-9.5 U4.29@67.084,-8.068 ; v1@37.183,-8.712 ccw(c37.728,-8.712) 37.342,-9.098 ; R39.2@38.022,-8.017 R39.2@38.048,-8.017 ; R39.2@38.048,-7.966 R39.2@38.048,-8.017 ; R39.2@38.073,-8.056 ccw(c38.326,-8.198) 38.121,-8.403 ; R39.2@38.204,-8.129 ccw(c38.506,-8.298) v1@38.261,-8.543 ; v1@38.23,-8.687 ccw(c37.807,-8.687) 38.106,-8.388 ccw(c38.405,-8.089) v1@38.405,-8.512 ; v1(38.405,-8.687) 38.048,-8.33 ; 38.048,-8.33 cw(c38.189,-8.33) 38.127,-8.203 ccw(c38.189,-8.33) 38.048,-8.33 ; 38.048,-8.33 ccw(c37.906,-8.33) 37.969,-8.203 cw(c37.906,-8.33) 38.048,-8.33 ; 38.048,-8.33 R39.2@38.048,-8.017
  Bottom Layer w0.15: v1(37.008,-8.712) 37.033,-8.738 38.354,-8.738 v1(38.405,-8.687) ; v1@37.132,-8.836 cw(c37.369,-9.073) 37.369,-8.738 ; v1@37.132,-8.588 ccw(c37.492,-8.228) 37.492,-8.738 ; 37.86,-8.738 ccw(c37.86,-8.142) v1@38.281,-8.563 ; 38.105,-8.738 cw(c38.105,-8.987) v1@38.281,-8.811
HO2: R17.2 U4.25 | length 24.6
  Top Layer w0.15: R17.2@43.282,-8.194 cw(c42.976,-8.499) 43.409,-8.499 cw(c43.841,-8.499) R17.2@43.535,-8.194 ; R17.2@43.409,-8.017 43.409,-8.509 43.637,-8.738 62.616,-8.738 64.084,-7.269 65.62,-7.269 U4.25@65.952,-6.936
HO3: R4.2 U4.22 | length 18.9
  Top Layer w0.15: R4.2@48.843,-7.931 49.382,-7.391 50.038,-7.391 50.495,-6.934 51.308,-6.934 52.324,-7.95 62.179,-7.95 63.703,-6.426 64.766,-6.426 U4.22@65.104,-6.088 ; R4.2@48.919,-7.65 ccw(c48.919,-7.157) 49.268,-7.506 ; R4.2@49.098,-7.829 cw(c49.469,-7.829) 49.206,-7.567 ; 64.509,-6.426 ccw(c64.509,-5.959) U4.22@64.839,-6.289
LH_OUT_01: P3.8 P3.10 U4.10 | length 23.4
  Top Layer w0.2: v1@67.372,-1.293 cw(c67.372,-1.655) 67.628,-1.399 cw(c67.884,-1.143) v1@67.522,-1.143 ; v1(67.372,-1.143) U4.10@68.427,-2.199
  Bottom Layer w0.2: 52.407,-5.461 cw(c52.407,-5.727) P3.8@52.595,-5.539 ; P3.10@52.883,-6.493 52.27,-6.493 52.151,-6.373 52.151,-5.558 52.248,-5.461 52.851,-5.461 P3.8@52.883,-5.493 58.921,-5.493 59.512,-4.902 62.408,-4.902 63.373,-3.937 63.373,-1.168 63.754,-0.787 67.016,-0.787 v1(67.372,-1.143) ; v1@67.222,-1.143 ccw(c66.859,-1.143) 67.115,-0.887 ccw(c67.372,-0.631) v1@67.372,-0.993
LH_OUT_02: P3.9 P3.11 U4.11 | length 22.3
  Top Layer w0.15: v1(66.294,-1.702) 66.87,-1.702 U4.11@67.367,-2.199 ; v1@66.418,-1.826 cw(c66.716,-2.124) 66.716,-1.702 cw(c66.716,-1.279) v1@66.418,-1.578
  Bottom Layer w0.15: P3.11@52.883,-6.993 53.408,-6.993 53.619,-6.782 53.619,-6.172 53.44,-5.993 ; P3.9@52.883,-5.993 53.44,-5.993 ; P3.11@53.188,-7.057 cw(c53.342,-7.211) 53.342,-6.993 cw(c53.342,-6.775) P3.11@53.188,-6.929 ; P3.9@53.188,-6.057 cw(c53.342,-6.211) 53.342,-5.993 cw(c53.342,-5.775) P3.9@53.188,-5.929 ; v1@66.119,-1.702 ccw(c65.697,-1.702) 65.995,-1.403 ccw(c66.294,-1.104) v1@66.294,-1.527 ; v1(66.294,-1.702) 65.71,-1.118 63.83,-1.118 63.678,-1.27 63.678,-4.089 62.509,-5.258 59.792,-5.258 59.08,-5.969 53.464,-5.969 53.44,-5.993
LO1: R41.2 U4.20 | length 37.1
  Top Layer w0.15: v1(34.341,-7.925) R41.2@35.136,-7.925 ; v1@34.465,-8.049 cw(c34.763,-8.347) 34.763,-7.925 cw(c34.763,-7.502) v1@34.465,-7.801 ; 34.635,-7.925 ccw(c34.635,-7.372) R41.2@35.025,-7.763 ; 34.805,-7.925 cw(c34.805,-8.237) R41.2@35.025,-8.016 ; v1@62.332,-6.302 ccw(c62.332,-5.88) 62.63,-6.178 ccw(c62.929,-6.477) v1@62.507,-6.477 ; v1@62.408,-6.508 62.408,-6.553 v1(62.332,-6.477) 64.389,-4.42 ; U4.20@64.546,-4.527 ccw(c64.389,-4.588) 64.389,-4.42 ; U4.20@64.821,-4.744 64.496,-4.42 64.389,-4.42
  Bottom Layer w0.15: v1(34.341,-7.925) 39.065,-7.925 39.776,-8.636 53.619,-8.636 54.534,-7.722 61.087,-7.722 v1(62.332,-6.477) ; v1@34.465,-8.049 cw(c34.763,-8.347) 34.763,-7.925 cw(c34.763,-7.502) v1@34.465,-7.801 ; v1@62.157,-6.477 cw(c61.734,-6.477) 62.033,-6.776 cw(c62.332,-7.074) v1@62.332,-6.652
LO2: R22.2 U4.19 | length 31.7
  Top Layer w0.15: v1(39.802,-7.849) 40.394,-7.849 R22.2@40.537,-7.991 ; v1@39.926,-7.972 cw(c40.224,-8.271) 40.224,-7.849 cw(c40.224,-7.426) v1@39.926,-7.725 ; v1@39.944,-7.849 cw(c39.944,-8.507) R22.2@40.41,-8.042 ; 40.265,-7.849 ccw(c40.265,-7.643) R22.2@40.41,-7.788 ; v1(61.392,-6.629) 64.084,-3.937 64.579,-3.937 U4.19@65.104,-4.462 ; v1@61.392,-6.454 ccw(c61.392,-6.032) 61.691,-6.331 ccw(c61.989,-6.629) v1@61.567,-6.629
  Bottom Layer w0.15: v1(39.802,-7.849) 42.774,-7.849 43.282,-8.357 53.518,-8.357 54.458,-7.417 60.604,-7.417 v1(61.392,-6.629) ; v1@39.926,-7.972 cw(c40.224,-8.271) 40.224,-7.849 cw(c40.224,-7.426) v1@39.926,-7.725 ; v1@61.217,-6.629 cw(c60.794,-6.629) 61.093,-6.928 cw(c61.392,-7.227) v1@61.392,-6.804
LO3: R10.2 U4.18 | length 25.9
  Top Layer w0.15: v1@45.314,-7.772 R10.2@46.05,-7.772 ; v1@45.387,-7.871 cw(c45.624,-8.108) 45.624,-7.772 ; v1@45.387,-7.623 ccw(c45.747,-7.263) R10.2@45.747,-7.772 ; v1@45.394,-7.772 cw(c45.394,-8.378) R10.2@45.822,-7.95 ; 45.639,-7.772 ccw(c45.639,-7.514) R10.2@45.822,-7.697 ; v1(60.452,-6.858) 63.729,-3.581 64.643,-3.581 64.789,-3.581 U4.18@65.387,-4.179 ; v1@60.452,-6.683 ccw(c60.452,-6.261) 60.751,-6.559 ccw(c61.049,-6.858) v1@60.627,-6.858
  Bottom Layer w0.15: v1@45.263,-7.922 cw(c45.263,-8.344) 45.562,-8.046 cw(c45.86,-7.747) v1@45.438,-7.747 ; v1(45.263,-7.747) 45.618,-8.103 53.391,-8.103 54.356,-7.137 60.173,-7.137 v1(60.452,-6.858) v1@60.528,-6.934
NetC1_2: C1.2 U1.1 | length 2.9
  Top Layer w0.3: U1.1@24.311,-5.293 25.263,-5.293 25.857,-4.699 C1.2@26.391,-4.699 ; U1.1@24.717,-5.399 cw(c24.973,-5.656) 24.973,-5.293 cw(c24.973,-4.931) U1.1@24.717,-5.187
NetC7_1: C7.1 R2.2 R5.1 U1.3 | length 7.4
  Top Layer w0.3: U1.3@24.311,-3.393 24.877,-3.393 26.187,-2.083 R2.2@26.34,-2.083 ; U1.3@24.611,-3.243 ccw(c24.611,-2.239) 25.321,-2.949 ; 25.772,-2.498 cw(c26.34,-3.066) R2.2@26.34,-2.263 ; 26.289,-1.633 ccw(c26.714,-1.633) R2.2@26.413,-1.933 ; 26.289,-1.074 cw(c26.627,-1.074) R5.1@26.388,-0.836 ; R5.1@26.289,-0.762 26.289,-2.032 R2.2@26.34,-2.083 ; R2.2@26.413,-2.156 cw(c26.652,-2.395) 26.652,-2.057 ; C7.1@27.534,-2.057 26.365,-2.057 R2.2@26.34,-2.083
NetC9_2: C9.2 Q1.1 R4.1 R6.1 | length 7.1
  Top Layer w0.2: Q1.1@48.543,-3.027 48.843,-3.327 R4.1@48.843,-6.712 ; Q1.1@48.555,-3.143 cw(c48.555,-3.392) Q1.1@48.731,-3.216 ; Q1.1@48.671,-3.027 ccw(c48.982,-3.027) 48.762,-3.247 ; R6.1@48.764,-5.551 cw(c48.574,-5.741) 48.843,-5.741 ; R6.1@48.764,-5.333 ccw(c48.574,-5.143) 48.843,-5.143 ; C9.2@48.764,-4.408 cw(c48.574,-4.598) 48.843,-4.598 ; C9.2@48.764,-4.19 ccw(c48.574,-4) 48.843,-4 ; 48.843,-6.054 ccw(c49.475,-6.054) R4.1@49.028,-6.501 ; 48.843,-5.887 cw(c49.318,-5.887) R6.1@48.982,-5.551 ; 48.843,-4.997 ccw(c49.318,-4.997) R6.1@48.982,-5.333 ; 48.843,-4.744 cw(c49.318,-4.744) C9.2@48.982,-4.408 ; 48.843,-3.854 ccw(c49.318,-3.854) C9.2@48.982,-4.19
NetC10_2: C10.2 C11.2 C12.2 D2.2 U2.4 | length 25.3
  Top Layer w0.3: C10.2@5.243,-3.151 ccw(c5.638,-2.757) 5.638,-3.315 ccw(c5.638,-3.872) 5.243,-3.478 5.245,-3.48 8.407,-3.48 9.07,-4.142 11.682,-4.142 ; C10.2@5.258,-3.315 6.833,-3.315 9.383,-3.315 9.976,-3.908 11.448,-3.908 11.682,-4.142 ; C11.2@6.466,-3.478 ccw(c6.072,-3.872) 6.072,-3.315 ccw(c6.072,-2.757) C11.2@6.466,-3.151 ; C11.2@6.793,-3.478 cw(c7.187,-3.872) 7.187,-3.315 cw(c7.187,-2.757) C11.2@6.793,-3.151 ; 7.299,-3.315 cw(c7.299,-6.306) D2.2@9.414,-4.191 ; 7.535,-3.315 cw(c7.535,-3.869) C12.2@7.927,-3.477 ; C12.2@8.023,-3.315 cw(c8.023,-5.581) D2.2@9.626,-3.979 ; C12.2@8.075,-3.477 cw(c8.467,-3.869) 8.467,-3.315 ; 8.748,-3.315 cw(c8.748,-4.857) D2.2@9.838,-3.766 ; 9.472,-3.315 cw(c9.472,-4.133) D2.2@10.05,-3.554 ; D2.2@9.98,-4.191 cw(c10.662,-4.874) 10.662,-3.908 cw(c10.662,-2.942) D2.2@9.98,-3.625 ; 11.573,-4.033 ccw(c11.944,-3.662) U2.4@11.975,-4.186 ; U2.4@11.975,-4.436 11.682,-4.142
NetC13_2: C13.2 Q1.8 R10.1 R12.1 | length 8.3
  Top Layer w0.2: Q1.8@45.677,-3.109 cw(c45.479,-3.307) 45.759,-3.307 cw(c46.039,-3.307) Q1.8@45.841,-3.109 ; Q1.8@45.759,-3.027 45.759,-3.773 45.949,-3.962 ; 45.793,-3.807 cw(c45.556,-4.044) C13.2@45.842,-4.219 ; R10.1@45.84,-6.495 ccw(c45.577,-6.232) 45.949,-6.232 ccw(c46.32,-6.232) R10.1@46.057,-6.495 ; R12.1@45.865,-5.551 cw(c45.664,-5.752) 45.949,-5.752 ; R12.1@45.865,-5.333 ccw(c45.664,-5.131) 45.949,-5.131 ; C13.2@45.865,-4.408 cw(c45.664,-4.609) 45.949,-4.609 ; C13.2@45.865,-4.19 ccw(c45.664,-3.988) 45.949,-3.988 ; 45.885,-3.899 cw(c45.548,-4.236) C13.2@46.02,-4.306 ; R10.1@45.949,-6.706 45.949,-4.299 45.949,-3.962 ; 45.949,-5.875 cw(c46.407,-5.875) R12.1@46.083,-5.551 ; 45.949,-5.009 ccw(c46.407,-5.009) R12.1@46.083,-5.333 ; 45.949,-4.732 cw(c46.407,-4.732) C13.2@46.083,-4.408 ; 45.973,-3.987 cw(c45.779,-4.18) C13.2@46.013,-4.323 ; C13.2@46.06,-4.171 cw(c46.2,-3.962) 45.949,-3.962
NetC17_2: C17.2 Q2.1 R17.1 R18.1 | length 12.8
  Top Layer w0.15: Q2.1@43.142,-3.136 cw(c42.499,-3.779) 43.409,-3.779 ; Q2.1@43.248,-3.03 cw(c42.861,-3.417) 43.409,-3.417 ; R18.1@43.28,-5.629 cw(c42.971,-5.938) 43.409,-5.938 ; R18.1@43.28,-5.375 ccw(c42.971,-5.066) 43.409,-5.066 ; C17.2@43.28,-4.46 cw(c42.971,-4.77) 43.409,-4.77 ; C17.2@43.28,-4.207 ccw(c42.971,-3.898) 43.409,-3.898 ; R17.1@43.282,-6.569 ccw(c42.976,-6.264) 43.409,-6.264 ccw(c43.841,-6.264) R17.1@43.535,-6.569 ; R17.1@43.409,-6.772 Q2.1@43.409,-3.216 ; 43.409,-5.93 cw(c43.835,-5.93) R18.1@43.534,-5.629 ; 43.409,-5.074 ccw(c43.835,-5.074) R18.1@43.534,-5.375 ; 43.409,-4.762 cw(c43.835,-4.762) C17.2@43.534,-4.46 ; 43.409,-3.905 ccw(c43.835,-3.905) C17.2@43.534,-4.207
  Top Layer w0.2: Q2.1@43.16,-3.119 cw(c42.747,-3.531) 43.331,-3.531 ; R18.1@43.222,-5.393 ccw(c42.959,-5.13) 43.331,-5.13 ccw(c43.703,-5.13) R18.1@43.44,-5.393 ; C17.2@43.222,-4.442 cw(c42.959,-4.705) 43.331,-4.705 cw(c43.703,-4.705) C17.2@43.44,-4.442 ; C17.2@43.222,-4.225 ccw(c42.959,-3.962) 43.331,-3.962 ccw(c43.703,-3.962) C17.2@43.44,-4.225 ; Q2.1@43.229,-3.037 43.331,-3.138 R18.1@43.331,-5.502
NetC18_2: C18.2 Q2.8 R22.1 R26.1 | length 7.1
  Top Layer w0.2: Q2.8@40.364,-3.119 cw(c40.166,-3.316) 40.446,-3.316 cw(c40.726,-3.316) Q2.8@40.528,-3.119 ; R22.1@40.428,-6.587 ccw(c40.165,-6.324) 40.537,-6.324 ccw(c40.909,-6.324) R22.1@40.646,-6.587 ; R26.1@40.428,-5.611 cw(c40.165,-5.874) 40.537,-5.874 cw(c40.909,-5.874) R26.1@40.646,-5.611 ; R26.1@40.428,-5.393 ccw(c40.165,-5.13) 40.537,-5.13 ccw(c40.909,-5.13) R26.1@40.646,-5.393 ; C18.2@40.428,-4.442 cw(c40.165,-4.705) 40.537,-4.705 cw(c40.909,-4.705) C18.2@40.646,-4.442 ; C18.2@40.428,-4.225 ccw(c40.165,-3.962) 40.537,-3.962 ccw(c40.909,-3.962) C18.2@40.646,-4.225 ; Q2.8@40.446,-3.037 40.446,-3.768 40.537,-3.859 C18.2@40.537,-4.334 R22.1@40.537,-6.772
NetC20_2: C20.2 Q9.1 R39.1 R40.1 | length 7.7
  Top Layer w0.15: C20.2@37.743,-5.375 ccw(c37.438,-5.07) 37.87,-5.07 ccw(c38.302,-5.07) C20.2@37.996,-5.375 ; R40.1@37.743,-4.46 cw(c37.438,-4.766) 37.87,-4.766 cw(c38.302,-4.766) R40.1@37.996,-4.46 ; R40.1@37.743,-4.207 ccw(c37.438,-3.901) 37.87,-3.901 ccw(c38.302,-3.901) R40.1@37.996,-4.207 ; C20.2@37.747,-5.632 cw(c37.479,-5.917) 37.87,-5.917 ; Q9.1@37.808,-3.136 cw(c37.66,-3.285) 37.87,-3.285 ; 37.87,-3.469 cw(c38.34,-3.469) Q9.1@38.008,-3.136 ; R39.1@37.921,-6.544 ccw(c37.677,-6.3) 38.022,-6.3 ; Q9.1@37.921,-3.037 37.87,-3.087 C20.2@37.87,-5.502 37.87,-5.917 ; C20.2@37.993,-5.632 ccw(c38.261,-5.917) 37.87,-5.917 ; R39.1@38.022,-6.797 38.022,-6.069 37.87,-5.917 ; 38.022,-6.177 ccw(c38.541,-6.177) R39.1@38.174,-6.544
NetC21_2: C21.2 Q9.8 R41.1 R42.1 | length 8
  Top Layer w0.15: R41.1@35.025,-6.544 ccw(c34.536,-6.054) 35.228,-6.054 ; Q9.8@35.038,-3.136 cw(c34.797,-3.377) 35.137,-3.377 cw(c35.477,-3.377) Q9.8@35.237,-3.136 ; R42.1@35.102,-5.629 cw(c34.796,-5.934) 35.228,-5.934 cw(c35.66,-5.934) R42.1@35.355,-5.629 ; R42.1@35.102,-5.375 ccw(c34.796,-5.07) 35.228,-5.07 ccw(c35.66,-5.07) R42.1@35.355,-5.375 ; C21.2@35.102,-4.46 cw(c34.796,-4.766) 35.228,-4.766 cw(c35.66,-4.766) C21.2@35.355,-4.46 ; C21.2@35.102,-4.207 ccw(c34.796,-3.901) 35.228,-3.901 ccw(c35.66,-3.901) C21.2@35.355,-4.207 ; R41.1@35.131,-6.65 ccw(c34.898,-6.416) R41.1@35.228,-6.416 ; Q9.8@35.137,-3.037 35.137,-3.667 35.228,-3.758 C21.2@35.228,-4.334 R41.1@35.228,-6.797 ; R41.1@35.228,-6.422 ccw(c35.4,-6.422) R41.1@35.279,-6.544
NetC28_1: C28.1 U4.2 | length 6.6
  Top Layer w0.2: U4.2@70.69,-4.462 71.062,-4.089 71.577,-4.089 ; U4.2@70.938,-4.242 cw(c71.307,-4.612) 71.307,-4.089 ; 71.984,-4.089 71.577,-4.089 ; C28.1@74.574,-6.004 ccw(c74.27,-6.208) 74.27,-5.842 ; C28.1@74.854,-5.918 74.778,-5.842 74.27,-5.842 ; 71.577,-4.089 73.127,-4.089 73.889,-4.851 73.889,-5.461 74.27,-5.842
NetC29_2: C29.2 U4.3 | length 5.9
  Top Layer w0.2: U4.3@70.407,-4.179 70.877,-3.708 71.907,-3.708 ; 72.111,-3.708 71.907,-3.708 ; C29.2@74.618,-4.833 ccw(c74.355,-5.096) 74.355,-4.724 ccw(c74.355,-4.353) C29.2@74.618,-4.616 ; C29.2@74.879,-4.724 74.346,-4.724 73.33,-3.708 71.907,-3.708
NetD1_2: D1.2 R1.2 | length 3.3
  Top Layer w0.2: R1.2@17.344,-5.907 ccw(c17.116,-5.664) 17.45,-5.664 ; R1.2@17.45,-6.121 17.45,-5.664 ; D1.2@17.529,-4.781 cw(c17.017,-5.293) 17.741,-5.293 cw(c18.466,-5.293) D1.2@17.953,-4.781 ; R1.2@17.555,-5.907 cw(c17.783,-5.664) 17.45,-5.664 ; D1.2@17.741,-4.619 17.741,-5.373 17.45,-5.664
NetD2_1: D2.1 L2.1 U2.3 | length 50.7
  Top Layer w0.254: D2.1@9.976,-1.007 10.736,-1.007 11.76,-2.032 11.76,-3.146 11.864,-3.249 ; D2.1@9.996,-1.306 cw(c10.718,-2.028) 10.718,-1.007 cw(c10.718,0.014) D2.1@9.996,-0.708 ; 10.926,-1.198 cw(c10.242,-1.882) L2.1@11.21,-1.882 ; 10.993,-1.265 ccw(c11.583,-0.676) L2.1@11.583,-1.509 ; L2.1@11.2,-1.472 11.256,-1.528 11.256,-2.642 11.864,-3.249 ; L2.1@11.389,-2.501 cw(c10.986,-3.162) 11.76,-3.162 ; L2.1@11.521,-2.284 cw(c11.261,-2.71) 11.76,-2.71 ; L2.1@11.76,-2.653 cw(c12.054,-2.653) L2.1@11.846,-2.446 ; 12.04,-3.425 11.864,-3.249
  Top Layer w0.3: D2.1@9.767,-1.078 cw(c10.591,-1.902) 10.591,-0.737 ; D2.1@9.767,-0.936 ccw(c10.45,-0.254) 10.45,-1.219 ; D2.1@9.79,-0.97 ccw(c10.379,-0.738) 10.379,-1.372 ; D2.1@10.069,-0.86 ccw(c10.82,-0.564) 10.82,-1.372 ; 10.622,-0.991 cw(c10.622,-0.082) 9.98,-0.724 ccw(c11.174,0.47) 11.174,-1.219 ; 10.703,-0.991 ccw(c10.703,-2.013) 9.98,-1.29 cw(c11.316,-2.626) 11.316,-0.737 ; 10.946,-1.498 ccw(c11.234,-1.209) L2.1@11.422,-1.571 ; L2.1@11.335,-2.429 cw(c10.922,-2.843) 11.506,-2.843 ; L2.1@11.481,-1.954 cw(c11.753,-2.564) 12.226,-2.091 ; 11.506,-2.896 cw(c11.967,-2.896) L2.1@11.748,-2.49 ; L2.1@11.557,-2.531 cw(c11.518,-3.051) 12.04,-3.051 ; L2.1@11.579,-2.232 cw(c11.542,-2.728) 12.04,-2.728 ; L2.1@11.587,-2.232 cw(c11.645,-2.984) 12.179,-2.451 ; L2.1@11.595,-2.23 cw(c11.728,-2.73) 12.093,-2.364 ; L2.1@11.601,-1.933 cw(c11.566,-2.405) L2.1@12.04,-2.405 ; L2.1@11.891,-2.197 cw(c12.167,-2.344) 12.167,-2.032 ; L2.1@11.891,-1.867 ccw(c12.167,-1.72) 12.167,-2.032 ; D2.1@9.976,-1.007 10.247,-0.737 11.836,-0.737 12.475,-1.376 12.475,-2.057 ; D2.1@9.976,-1.007 10.341,-1.372 10.82,-1.372 ; D2.1@9.976,-1.007 10.188,-1.219 11.963,-1.219 ; D2.1@9.976,-1.007 9.993,-0.991 11.735,-0.991 11.963,-1.219 ; 10.82,-1.372 11.481,-2.032 L2.1@11.76,-2.032 ; 10.82,-1.372 12.116,-1.372 ; L2.1@11.76,-2.032 11.506,-2.286 11.506,-2.892 12.169,-3.554 ; L2.1@11.76,-2.032 12.167,-2.032 ; L2.1@11.76,-2.032 L2.1@12.04,-2.311 ; L2.1@11.76,-2.032 12.298,-2.569 12.298,-3.683 ; L2.1@11.76,-2.032 12.475,-2.747 U2.3@12.475,-4.436 12.475,-4.013 ; 11.963,-1.219 11.963,-2.235 L2.1@12.04,-2.311 ; 11.963,-1.219 12.116,-1.372 ; L2.1@12.04,-2.311 12.04,-2.921 12.04,-3.425 12.169,-3.554 ; 12.116,-1.372 12.268,-1.524 ; 12.167,-2.032 12.475,-2.341 ; 12.169,-3.554 12.298,-3.683 ; 12.268,-1.524 12.268,-2.134 12.475,-2.341 ; 12.268,-1.524 12.475,-1.731 12.475,-2.057 ; 12.298,-3.683 12.475,-3.861 12.475,-4.013 ; 12.475,-4.013 12.475,-2.341 ; 12.475,-2.341 12.475,-2.057
NetD3_2: D3.2 R14.1 | length 3.5
  Top Layer w0.2: D3.2@19.844,-0.864 19.971,-0.737 R14.1@21.057,-0.737 ; D3.2@19.914,-0.934 cw(c20.392,-1.412) 20.392,-0.737 ; D3.2@20.056,-1.076 cw(c20.874,-1.894) R14.1@20.874,-0.737 ; D3.2@20.056,-0.651 ccw(c20.261,-0.446) 20.261,-0.737 ; R14.1@20.872,-0.845 ccw(c20.609,-1.108) 20.609,-0.737 ccw(c20.609,-0.365) R14.1@20.872,-0.628
NetD4_1: D4.1 R23.1 | length 2.9
  Top Layer w0.3: D4.1@109.301,-5.904 cw(c108.943,-6.261) 109.449,-6.261 ; R23.1@109.449,-7.696 D4.1@109.449,-5.756 ; 109.449,-6.4 cw(c110.151,-6.4) D4.1@109.654,-5.904
NetD4_2: D4.2 Q3.3 | length 24.8
  Top Layer w0.2: Q3.3@93.777,-8.357 95.326,-8.357 cw(c95.326,-7.672) Q3.3@94.759,-8.055 ; Q3.3@94.593,-8.167 ccw(c94.95,-7.926) 94.95,-8.357 ; Q3.3@94.715,-8.508 cw(c95.08,-8.872) v1@95.08,-8.357 ; Q3.3@94.877,-8.357 ccw(c94.877,-7.908) v1@95.195,-8.225 ; 95,-8.357 cw(c95,-8.632) v1@95.195,-8.437 ; D4.2@109.258,-3.916 ccw(c108.746,-3.404) 109.471,-3.404 ccw(c110.195,-3.404) D4.2@109.683,-3.916 ; v1@109.292,-2.316 cw(c108.86,-2.748) 109.471,-2.748 ; D4.2@109.471,-4.128 v1@109.471,-2.283
  Bottom Layer w0.2: v1(95.301,-8.331) 103.276,-8.331 v1(109.398,-2.21) ; v1@95.407,-8.437 cw(c95.663,-8.693) 95.663,-8.331 cw(c95.663,-7.969) v1@95.407,-8.225 ; v1@109.248,-2.21 cw(c108.886,-2.21) 109.142,-2.466 cw(c109.398,-2.722) v1@109.398,-2.36
NetD5_1: D5.1 R24.1 | length 3
  Top Layer w0.3: D5.1@106.303,-5.853 cw(c105.885,-6.272) 106.477,-6.272 ; R24.1@106.477,-7.696 D5.1@106.477,-5.68 ; 106.477,-6.288 cw(c107.092,-6.288) D5.1@106.657,-5.853
NetD5_2: D5.2 Q4.3 | length 18.5
  Top Layer w0.2: Q4.3@94.361,-5.004 v1(95.631,-5.004) ; Q4.3@94.791,-5.256 cw(c95.401,-5.866) 95.401,-5.004 cw(c95.401,-4.141) Q4.3@94.791,-4.751 ; v1@95.525,-5.11 ccw(c95.269,-5.366) 95.269,-5.004 ccw(c95.269,-4.642) v1@95.525,-4.898 ; D5.2@106.261,-3.865 ccw(c105.68,-3.283) v1@106.502,-3.283 ; v1@106.396,-3.357 cw(c106.14,-3.613) 106.502,-3.613 cw(c106.864,-3.613) v1@106.608,-3.357 ; D5.2@106.473,-4.077 106.502,-4.049 v1(106.502,-3.251) ; v1@106.502,-3.423 ccw(c107.128,-3.423) D5.2@106.686,-3.865
  Bottom Layer w0.2: v1(95.631,-5.004) 104.75,-5.004 v1(106.502,-3.251) ; v1@95.737,-5.11 cw(c95.993,-5.366) 95.993,-5.004 cw(c95.993,-4.642) v1@95.737,-4.898 ; v1@106.352,-3.251 cw(c105.99,-3.251) 106.246,-3.507 cw(c106.502,-3.763) v1@106.502,-3.401
NetD6_1: D6.1 R25.1 | length 3.8
  Top Layer w0.2: D6.1@112.212,-5.838 cw(c111.647,-6.403) 112.446,-6.403 ; R25.1@112.337,-7.511 ccw(c112.074,-7.248) 112.446,-7.248 ccw(c112.818,-7.248) R25.1@112.555,-7.511 ; D6.1@112.424,-5.625 112.446,-5.647 R25.1@112.446,-7.696 ; 112.446,-6.297 cw(c113.095,-6.297) D6.1@112.636,-5.838